# EAGLE board ruido_v5_main (EAGLE 5.10)
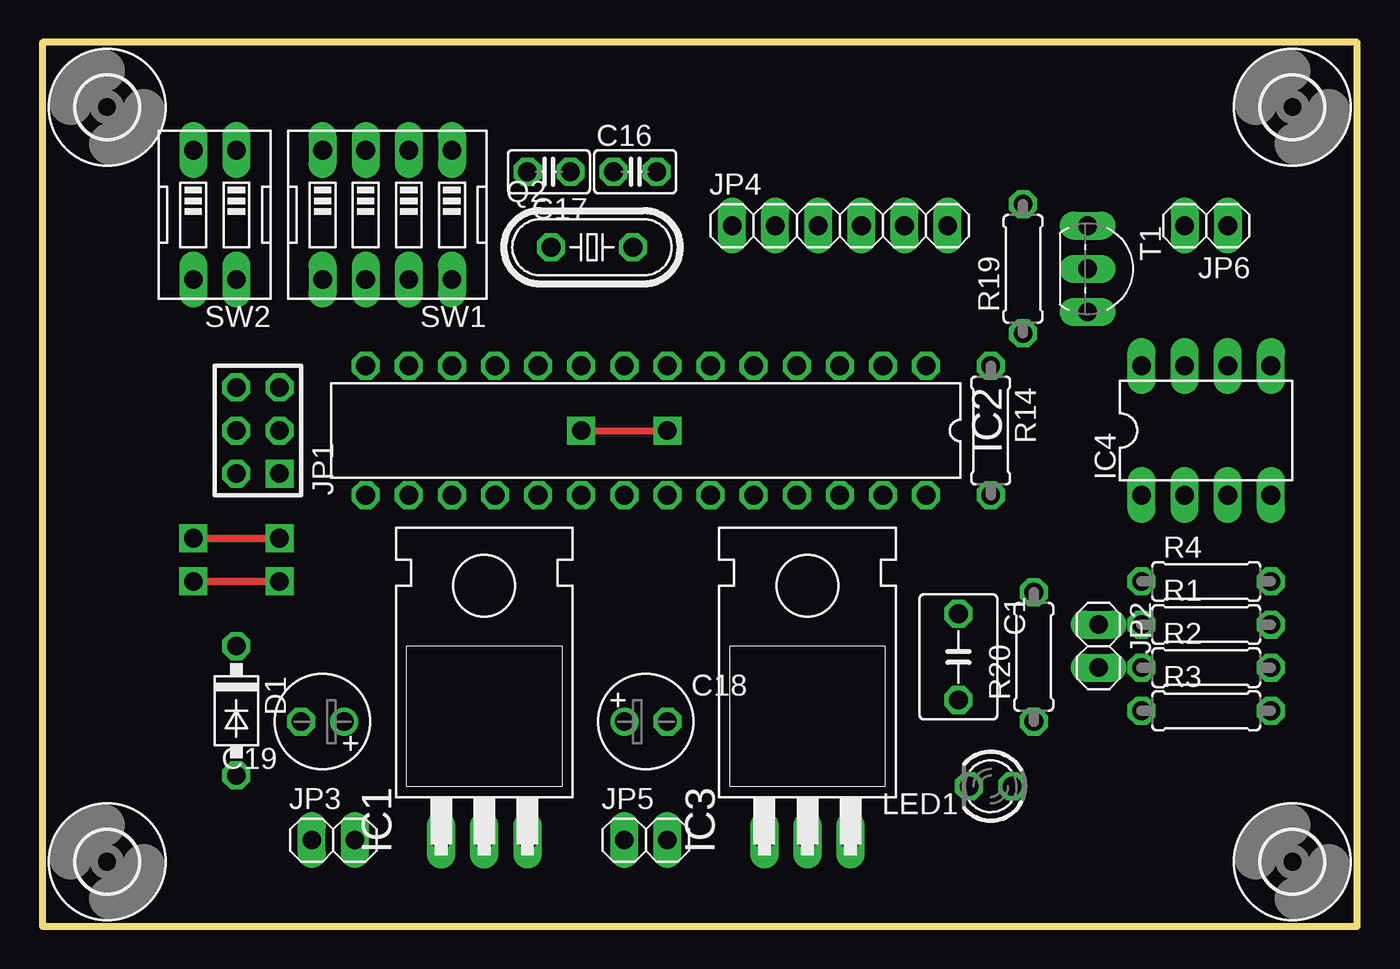
[diagram p0: board, top side]
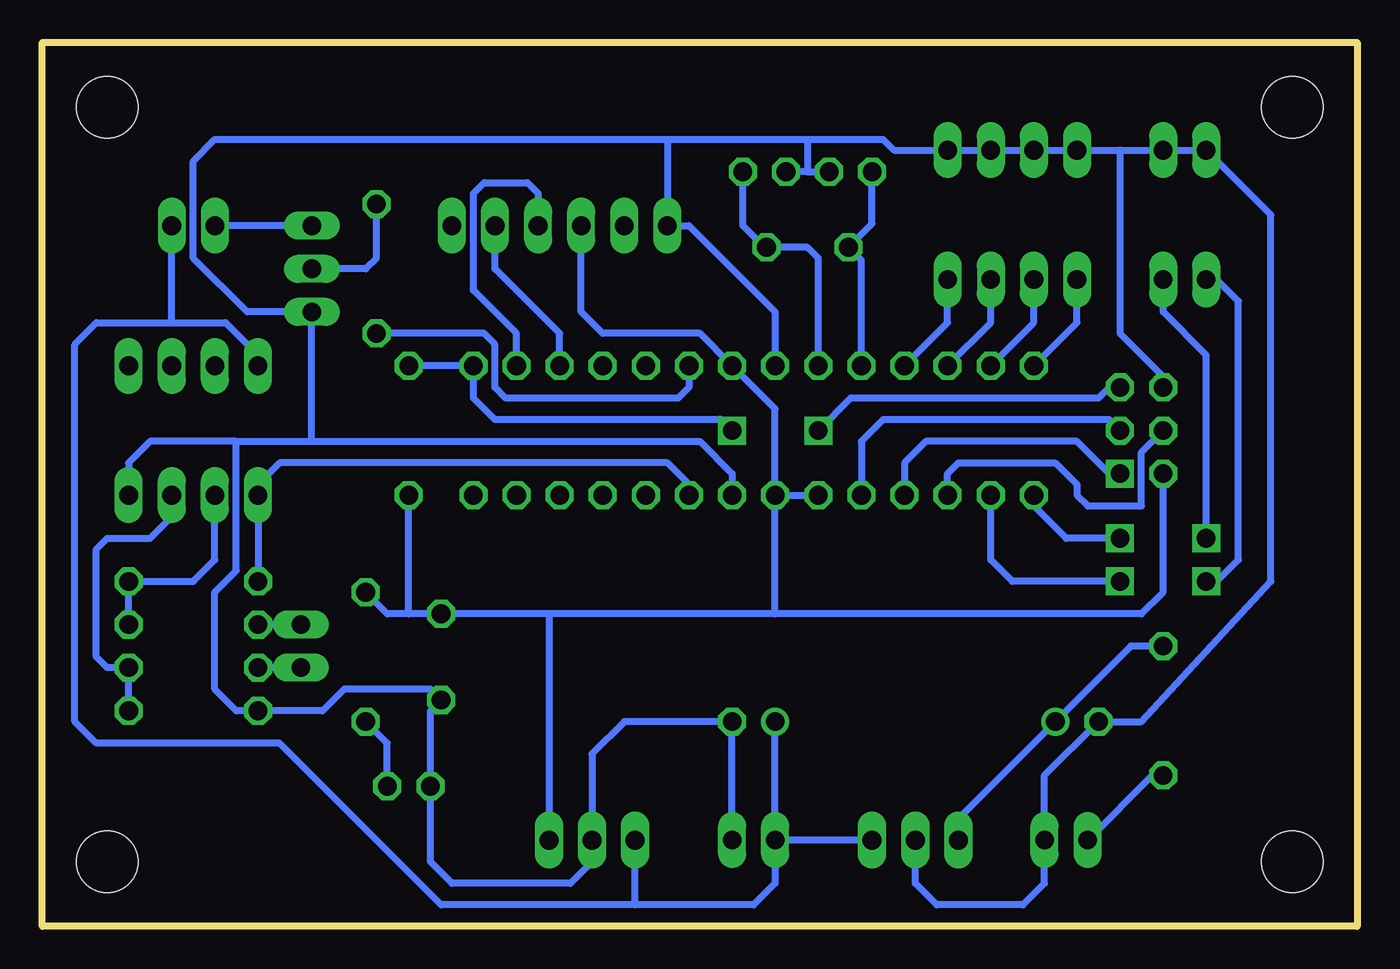
[diagram p1: board, bottom side, seen from below]

Size 77.47 x 52.07 mm. Coordinates in mm from the lower left corner, seen from the top.
Outline: 77.47,0 77.47,52.07 0,52.07 0,0 77.47,0
Copper layers (1*16): Top 0.035mm / dielectric 1.5mm / Bottom 0.035mm
Design rules "default": minimum track width 10mil, minimum drill 24mil, track to track 8mil, track to pad 8mil, pad to pad 8mil, via to via 8mil, smd to smd 8mil, copper to edge 40mil, drill to drill 8mil, minimum pad ring 10mil, minimum via ring 8mil, stop-mask expansion 4mil, vias tented up to drill 0mil, thermal gap 10mil

## Footprints (pad centres in the part's own frame; a part is rotated, then mirrored left to right if it is on the bottom)
C050-045X075 = drill 1.1 octagon: 1 -2.54,0; 2 2.54,0
C025-025X050 = drill 1.1 octagon: 1 -1.27,0; 2 1.27,0
E2,5-6 = drill 1.1 round: + -1.27,0 | drill 1.1 pad 1.6 octagon: - 1.27,0
DO41-7 = drill 1.1 octagon: A 3.81,0; C -3.81,0
78XXH = drill 1.118 long: GND 0,-11.43; IN -2.54,-11.43; OUT 2.54,-11.43
DIL28-3 = drill 1.1 octagon: 1 -16.51,-3.81; 2 -13.97,-3.81; 3 -11.43,-3.81; 4 -8.89,-3.81; 5 -6.35,-3.81; 6 -3.81,-3.81; 7 -1.27,-3.81; 8 1.27,-3.81; 9 3.81,-3.81; 10 6.35,-3.81; 11 8.89,-3.81; 12 11.43,-3.81; 13 13.97,-3.81; 14 16.51,-3.81; 15 16.51,3.81; 16 13.97,3.81; 17 11.43,3.81; 18 8.89,3.81; 19 6.35,3.81; 20 3.81,3.81; 21 1.27,3.81; 22 -1.27,3.81; 23 -3.81,3.81; 24 -6.35,3.81; 25 -8.89,3.81; 26 -11.43,3.81; 27 -13.97,3.81; 28 -16.51,3.81
DIL08 = drill 1.1 long: 1 -3.81,-3.81; 2 -1.27,-3.81; 3 1.27,-3.81; 4 3.81,-3.81; 5 3.81,3.81; 6 1.27,3.81; 7 -1.27,3.81; 8 -3.81,3.81
AVR-ISP-6 = drill 1.1 square: 1 -2.54,-1.27 | drill 1.1 octagon: 2 -2.54,1.27; 3 0,-1.27; 4 0,1.27; 5 2.54,-1.27; 6 2.54,1.27
1X02 = drill 1.1 long: 1 -1.27,0; 2 1.27,0
1X06 = drill 1.1 long: 1 -6.35,0; 2 -3.81,0; 3 -1.27,0; 4 1.27,0; 5 3.81,0; 6 6.35,0
LED3MM = drill 1.1 octagon: A -1.27,0; K 1.27,0
HC49/S = drill 1.1 octagon: 1 -2.413,0; 2 2.413,0
0207/7 = drill 1.1 octagon: 1 -3.81,0; 2 3.81,0
EDG-04 = drill 1.1 long: 1 -3.81,-3.81; 2 -1.27,-3.81; 3 1.27,-3.81; 4 3.81,-3.81; 5 3.81,3.81; 6 1.27,3.81; 7 -1.27,3.81; 8 -3.81,3.81
EDG-02 = drill 1.1 long: 1 -1.27,-3.81; 2 1.27,-3.81; 3 1.27,3.81; 4 -1.27,3.81
TO92- = drill 1.1 long: 1 2.54,0; 2 0,0; 3 -2.54,0
3,6 = hole 3.6: 0,0

## Placement (x,y rotation side)
C1  100nF  [C050-045X075]  53.98,15.88 270 top
C16  0.1uF  [C025-025X050]  34.92,44.45 0 top
C17  0.1uF  [C025-025X050]  29.84,44.45 180 top
C18  220uF/16V  [E2,5-6]  35.56,12.06 0 top
C19  220uF/16V  [E2,5-6]  16.51,12.06 180 top
D1  1N4001  [DO41-7]  11.43,12.7 270 top
IC1  7809  [78XXH]  26.04,16.51 0 top
IC2  MEGA8-P  [DIL28-3]  35.56,29.21 180 top
IC3  7805  [78XXH]  45.09,16.51 0 top
IC4  LM358N  [DIL08]  68.58,29.21 0 top
JP1  AVR-ISP-6  [AVR-ISP-6]  12.7,29.21 90 top
JP2  [1X02]  62.23,16.51 270 top
JP3  [1X02]  17.14,5.08 0 top
JP4  [1X06]  46.99,41.27 0 top
JP5  [1X02]  35.56,5.08 0 top
JP6  [1X02]  68.58,41.27 180 top
LED1  [LED3MM]  55.88,8.26 180 top
Q2  [HC49/S]  32.38,40.01 0 top
R1  1k  [0207/7]  68.58,17.78 0 top
R2  1k  [0207/7]  68.58,15.24 0 top
R3  4.7k  [0207/7]  68.58,12.7 0 top
R4  4.7k  [0207/7]  68.58,20.32 0 top
R14  10 K  [0207/7]  55.88,29.21 270 top
R19  1k  [0207/7]  57.78,38.73 90 top
R20  1 K  [0207/7]  58.42,15.88 90 top
SW1  [EDG-04]  20.32,41.91 180 top
SW2  [EDG-02]  10.16,41.91 180 top
T1  BC547  [TO92-]  61.59,38.73 270 top
U$2  [3,6]  73.66,3.81 90 top
U$3  [3,6]  73.66,48.26 90 top
U$4  [3,6]  3.81,48.26 90 top
U$5  [3,6]  3.81,3.81 90 top

## Library data of the parts
C1 C16-C19 D1 IC1-IC4 JP1-JP6 LED1 Q2 R1-R4 R14 R19 R20 SW1 SW2 T1 U$2-U$5 = ruido

## Nets
+5V: C1.1 IC2.7 IC2.20 IC2.21 IC3.OUT JP1.2 JP4.3 R14.2 R20.2
+12V: C18.+ IC1.OUT IC3.IN IC4.8 JP5.1 JP6.1
GND: C1.2 C16.1 C17.1 C18.- C19.- IC1.GND IC2.8 IC2.22 IC3.GND IC4.4 JP1.6 JP3.2 JP4.1 JP5.2 LED1.K R3.1 SW1.1 SW1.2 SW1.3 SW1.4 SW2.1 SW2.2 T1.1
MISO: IC2.18 JP1.1
MOSI: IC2.17 JP1.4
N$1: C19.+ D1.C IC1.IN
N$2: JP6.2 T1.3
N$3: IC4.3 R2.2 R3.2
N$4: IC4.2 R1.2 R4.2
N$5: IC2.15 SW2.4
N$6: IC2.16 SW2.3
N$11: R19.2 T1.2
N$15: IC2.14 SW1.5
N$18: C16.2 IC2.9 Q2.2
N$19: C17.2 IC2.10 Q2.1
N$22: IC2.13 SW1.6
N$23: IC2.12 SW1.7
N$24: IC2.11 SW1.8
N$30: LED1.A R20.1
N$37: D1.A JP3.1
PWM: IC2.6 R19.1
RST: IC2.1 JP1.5 R14.1
RXD: IC2.2 JP4.4
SCK: IC2.19 JP1.3
SIG: IC2.23 IC4.1 R4.1
TXD: IC2.3 JP4.5
V_GND: JP2.1 R1.1
V_SIG: JP2.2 R2.1

## Tracks (layer width: path | path; a pad name or v marks a point on that pad's centre or on a via)
+5V
  Bottom 0.406: 47.62,18.41 IC3.OUT | 47.62,18.41 C1.1 55.88,18.41 | 55.88,18.41 57.15,18.41 R20.2 | 55.88,18.41 R14.2 | JP1.2 11.43,19.68 12.7,18.41 34.29,18.41 | 34.29,18.41 47.62,18.41 | IC2.21 IC2.20 | 34.29,18.41 IC2.21 | JP4.3 45.72,36.2 44.45,34.92 38.73,34.92 IC2.7 34.29,30.48 IC2.21
+12V
  Bottom 0.406: IC1.OUT JP5.1 | JP5.1 C18.+ | 42.55,3.81 IC3.IN 42.55,1.27 | IC4.8 64.77,33.66 66.67,35.56 69.85,35.56 | 42.55,1.27 53.98,1.27 63.5,10.79 74.3,10.79 75.56,12.06 75.56,34.29 74.3,35.56 69.85,35.56 | JP5.1 34.29,2.54 35.56,1.27 42.55,1.27 | 69.85,35.56 JP6.1
GND
  Bottom 0.406: JP5.2 C18.- 43.18,12.06 45.09,10.16 IC3.GND 45.09,3.81 46.35,2.54 53.34,2.54 54.61,3.81 LED1.K 54.61,12.7 C1.2 54.61,13.97 59.69,13.97 60.96,12.7 R3.1 66.04,12.7 67.31,13.97 67.31,19.68 66.04,20.95 66.04,28.57 | 32.38,44.45 C16.1 | 13.97,45.72 SW2.1 SW2.2 5.08,41.91 5.08,20.32 12.7,12.06 C19.- 18.41,8.89 JP3.2 18.41,2.54 19.68,1.27 24.77,1.27 26.04,2.54 IC1.GND | 13.97,45.72 SW1.4 SW1.3 SW1.2 SW1.1 27.3,45.72 27.94,46.35 32.38,46.35 | 40.64,46.35 32.38,46.35 | 32.38,44.45 C17.1 | 32.38,46.35 32.38,44.45 | IC2.8 34.29,36.2 39.37,41.27 JP4.1 40.64,46.35 | 61.59,28.57 T1.1 65.41,36.2 68.58,39.37 68.58,45.09 67.31,46.35 40.64,46.35 | 66.04,28.57 61.59,28.57 | 66.04,28.57 71.12,28.57 72.39,27.3 IC4.4 | IC2.22 36.83,26.67 38.73,28.57 61.59,28.57 | JP1.6 11.43,32.38 13.97,34.92 13.97,45.72
MISO
  Bottom 0.406: JP1.1 14.61,26.67 16.51,28.57 25.4,28.57 26.67,27.3 IC2.18
MOSI
  Bottom 0.406: IC2.17 24.13,26.67 23.5,27.3 17.78,27.3 16.51,26.04 16.51,25.4 15.88,24.77 12.7,24.77 12.7,27.94 JP1.4
N$1
  Bottom 0.406: IC1.IN 23.5,6.35 C19.+ 13.34,16.51 D1.C
N$2
  Bottom 0.406: T1.3 JP6.2
N$3
  Bottom 0.406: R3.2 R2.2 73.66,15.24 74.3,15.88 74.3,22.23 73.66,22.86 71.12,22.86 69.85,24.13 IC4.3
N$4
  Bottom 0.406: R1.2 R4.2 68.58,20.32 67.31,21.59 IC4.2
N$5  (via drill 1.1)
  Top 0.406: v8.89,22.86 v13.97,22.86
  Bottom 0.406: v13.97,22.86 17.14,22.86 19.05,24.77 IC2.15 | SW2.4 11.43,36.2 8.89,33.66 v8.89,22.86
N$6  (via drill 1.1)
  Top 0.406: v8.89,20.32 v13.97,20.32
  Bottom 0.406: v13.97,20.32 20.32,20.32 21.59,21.59 IC2.16 | v8.89,20.32 8.26,20.32 6.99,21.59 6.99,36.83 8.26,38.1 SW2.3
N$11
  Bottom 0.406: R19.2 57.78,39.37 58.42,38.73 T1.2
N$15
  Bottom 0.406: SW1.5 16.51,35.56 IC2.14
N$18
  Bottom 0.406: IC2.9 31.75,39.37 32.38,40.01 Q2.2 34.92,40.01 36.2,41.27 C16.2
N$19
  Bottom 0.406: C17.2 28.57,41.4 Q2.1 29.21,39.24 IC2.10
N$22
  Bottom 0.406: SW1.6 19.05,35.56 IC2.13
N$23
  Bottom 0.406: SW1.7 21.59,35.56 IC2.12
N$24
  Bottom 0.406: SW1.8 24.13,35.56 IC2.11
N$30
  Bottom 0.406: LED1.A 57.15,10.79 R20.1
N$37
  Bottom 0.406: D1.A 12.06,8.89 JP3.1
PWM
  Bottom 0.406: R19.1 51.44,34.92 50.8,34.29 50.8,31.75 50.16,31.11 40.01,31.11 39.37,31.75 IC2.6
RST  (via drill 1.1)
  Top 0.406: v31.75,29.21 v36.83,29.21
  Bottom 0.406: R14.1 IC2.1 52.07,31.11 50.8,29.84 37.47,29.84 v36.83,29.21 | JP1.5 14.61,31.75 15.24,31.11 29.84,31.11 v31.75,29.21
RXD
  Bottom 0.406: JP4.4 48.26,43.18 48.9,43.81 51.44,43.81 52.07,43.18 52.07,37.47 49.53,34.92 IC2.2
SCK
  Bottom 0.406: JP1.3 14.61,29.84 27.94,29.84 29.21,28.57 IC2.19
SIG
  Bottom 0.406: R4.1 IC4.1 64.77,26.04 63.5,27.3 40.64,27.3 39.37,26.04 IC2.23
TXD
  Bottom 0.406: IC2.3 46.99,34.92 50.8,38.73 JP4.5
V_GND
  Bottom 0.406: JP2.1 R1.1
V_SIG
  Bottom 0.406: JP2.2 R2.1